# Altium PCB pcb.PcbDoc
Units mm, origin at the board's own origin, x right, y up, seen from the top; angles counter-clockwise.
Board outline 125 x 90 mm, 2 copper layers (Top Layer, Bottom Layer); 5 components, 8 nets, 56 pads, 0 vias.
Unrouted connection lines stored in the file: 8.
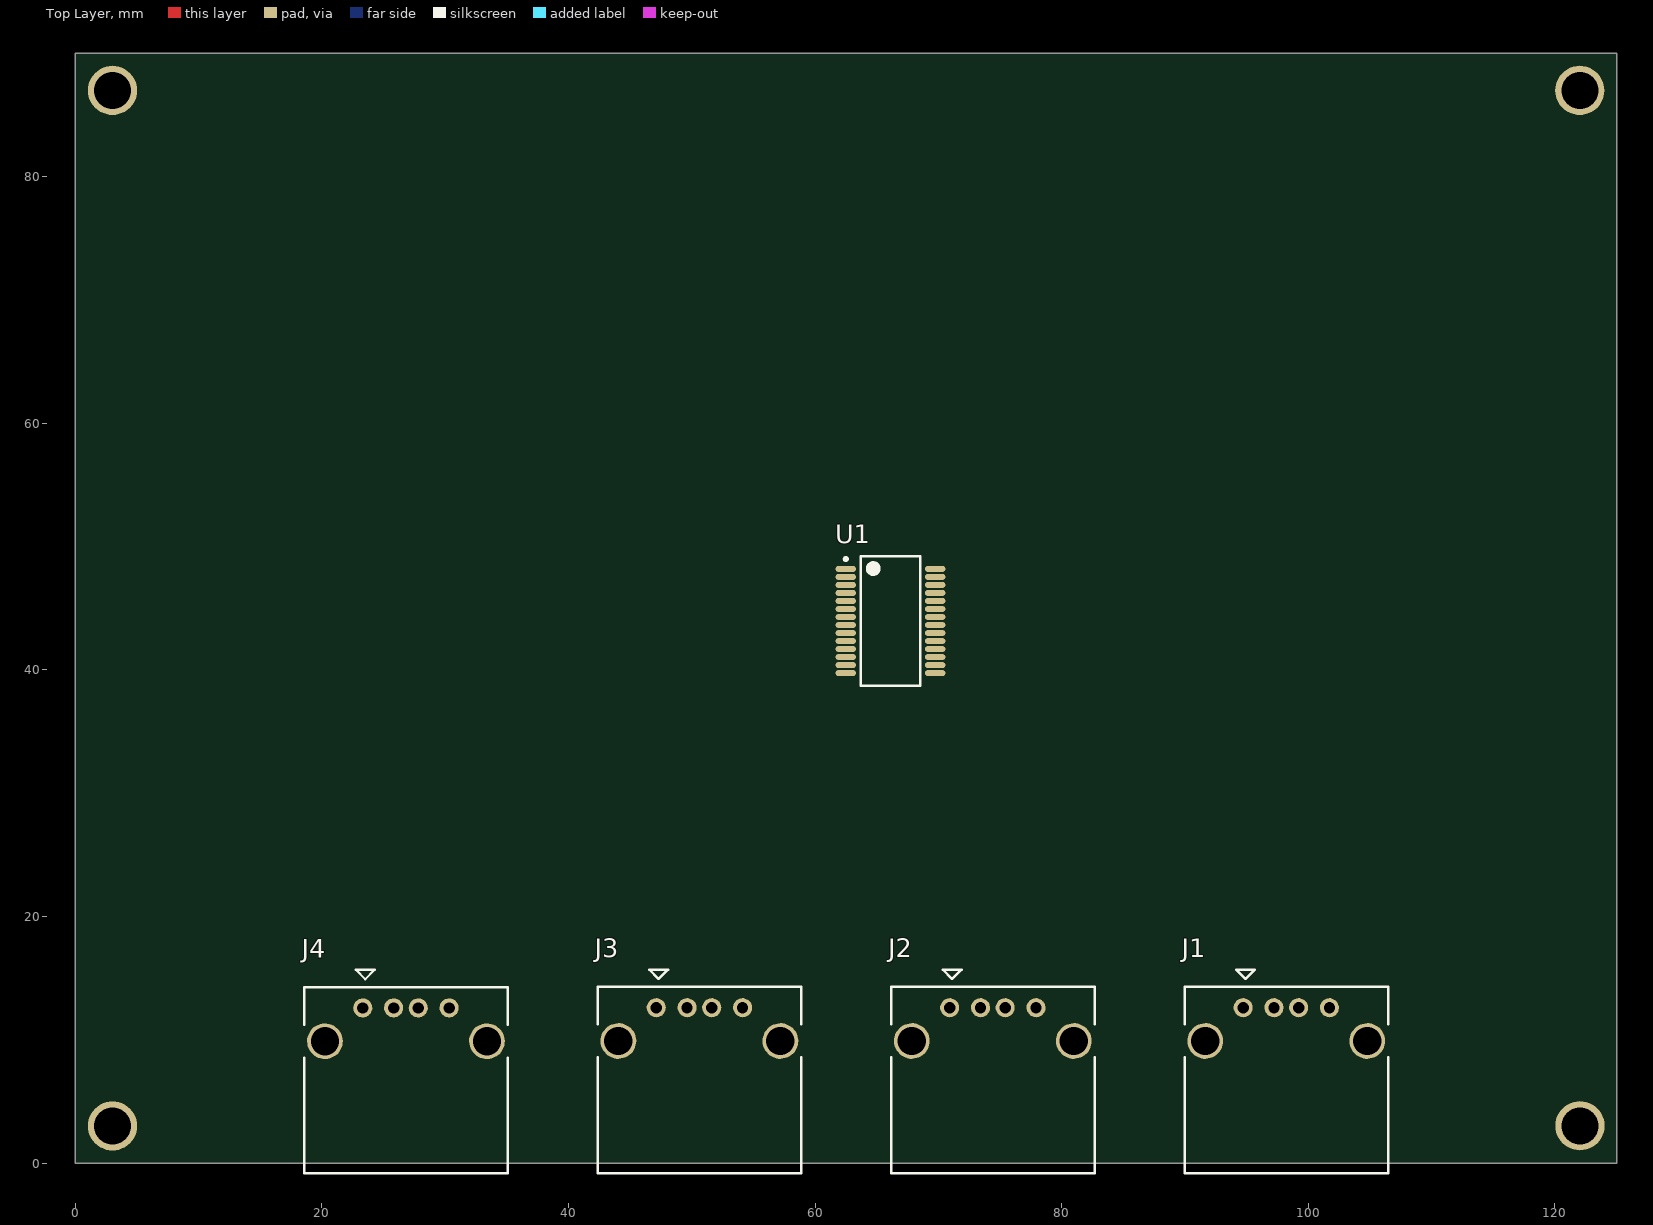
[diagram p0: Top Layer view]
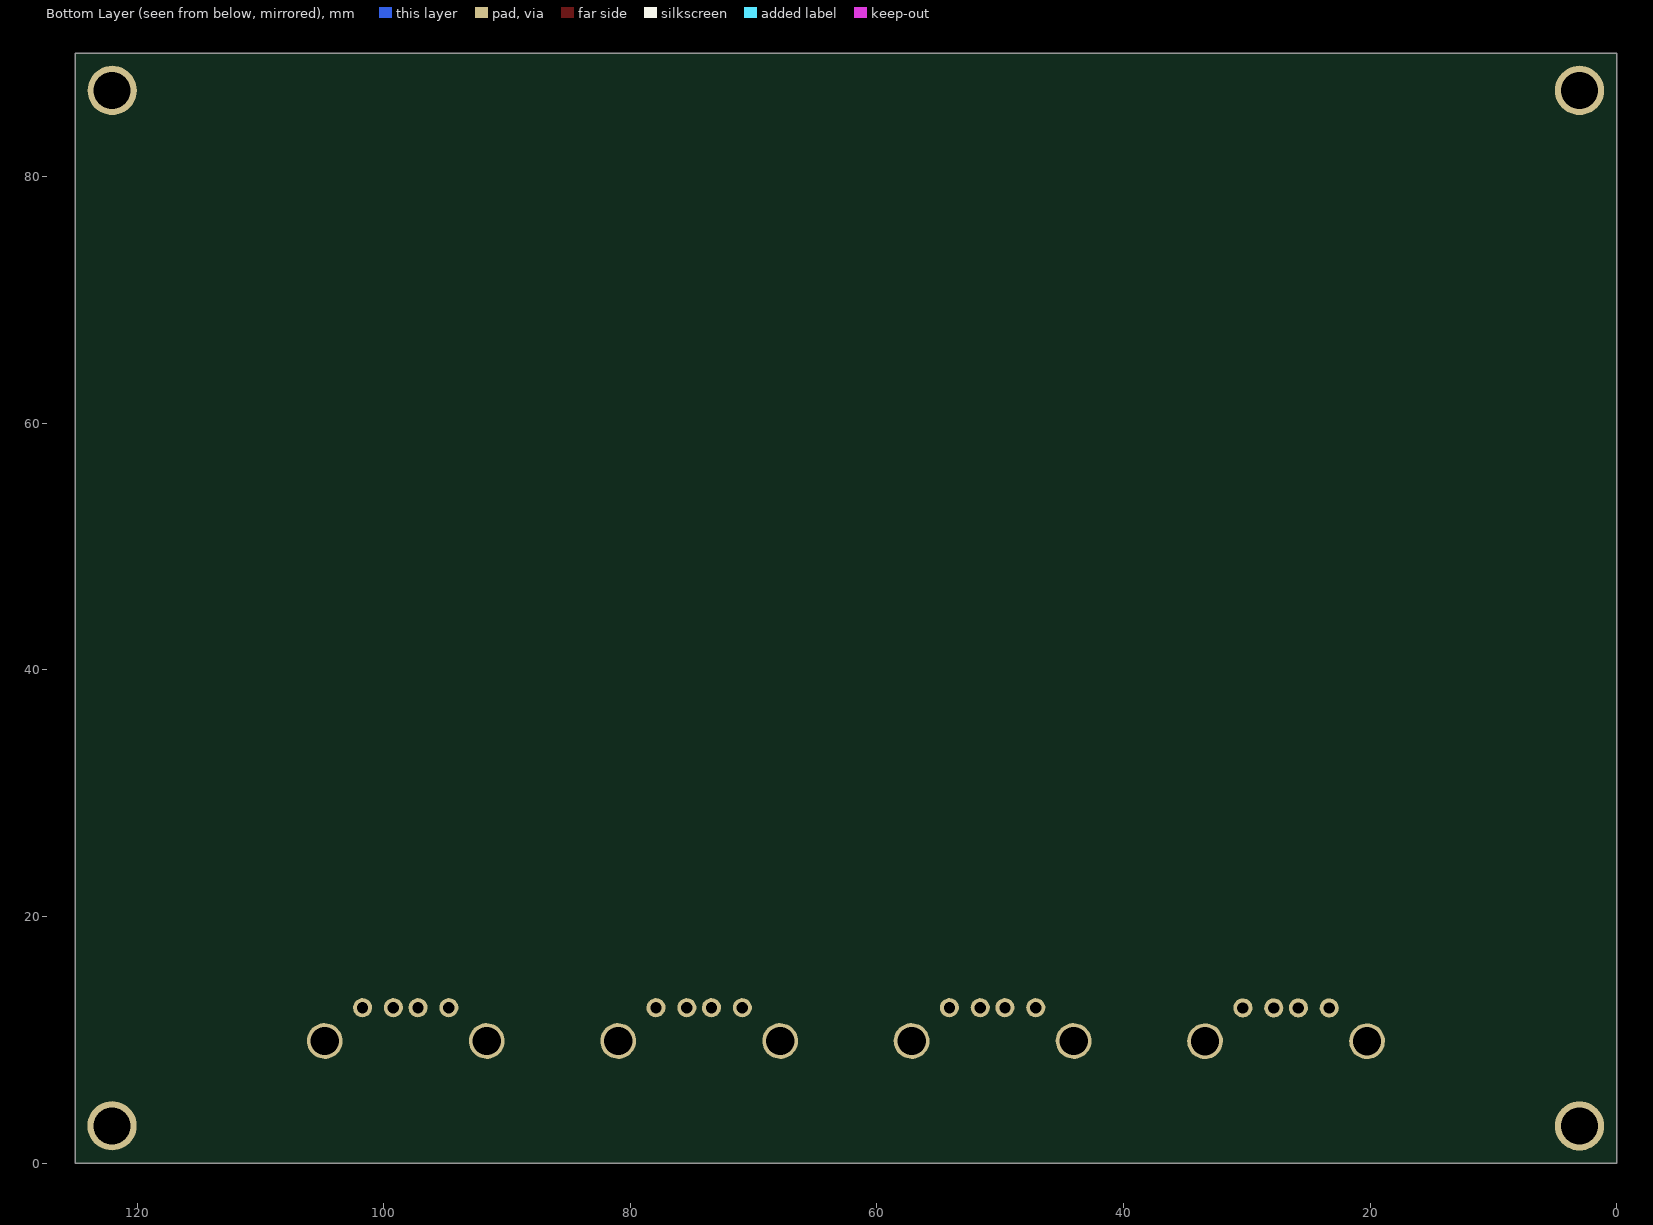
[diagram p1: Bottom Layer view, seen from below]

## Layer stack, top to bottom
Top Solder: solder mask 0.0102, Solder Resist, Dk 3.5
Top Layer: signal copper 0.0356
Dielectric 1: dielectric 0.32, FR-4, Dk 4.8
Bottom Layer: signal copper 0.0356
Bottom Solder: solder mask 0.0102, Solder Resist, Dk 3.5

## Board outline
0,0 125,0 125,90 0,90

## Design rules (kind name [scope] priority, off if disabled: settings)
Clearance [All] p1: gap=0.254
PolygonConnect [All] p1: connectstyle=Relief reliefconductorwidth=0.254 reliefentries=4 polygonreliefangle="90 Angle" airgapwidth=0.254
RoutingVias [All] p1: holewidth=0.711 width=1.27 viastyle="Through Hole" minholewidth=0.711 minwidth=1.27 maxholewidth=0.711 maxwidth=1.27
SolderMaskExpansion [All] p1: expansion=0.102
Width [All] p1: maxlimit=0.254 minlimit=0.254 preferedwidth=0.254
30 further rules are at their usual default settings.

## Components (designator, comment, footprint, x,y, rotation, side; value= is the part's Value field where it differs from the comment)
J1 "8492121" WE-EPLE 98.21,11.25 r0 top
J2 "8492121" WE-EPLE 74.41,11.25 r0 top
J3 "8492121" WE-EPLE 50.61,11.25 r0 top
J4 "8492121" WE-EPLE 26.81,11.23 r0 top
U1 "GL850G" SOP65P780X200-28N 66.108,43.966 r0 top

## Footprints (in the part's own frame and the unit in brackets; to place one, negate y for a bottom-side part, rotate by r counter-clockwise, add the part's x,y. Pads: shape width x height; smd on the part's side, far side on the other; paste and mask are expansions set on the pad)
SOP65P780X200-28N [mm] "SOP, 28-Leads, Body 10.20x5.30mm, Pitch 0.65mm, IPC Medium Density"
  oval 1.65x0.5 smd: 1(-3.625,4.225) 2(-3.625,3.575) 3(-3.625,2.925) 4(-3.625,2.275) 5(-3.625,1.625) 6(-3.625,0.975) 7(-3.625,0.325) 8(-3.625,-0.325) 9(-3.625,-0.975) 10(-3.625,-1.625) 11(-3.625,-2.275) 12(-3.625,-2.925) 13(-3.625,-3.575) 14(-3.625,-4.225) 15(3.625,-4.225) 16(3.625,-3.575) 17(3.625,-2.925) 18(3.625,-2.275) 19(3.625,-1.625) 20(3.625,-0.975) 21(3.625,-0.325) 22(3.625,0.325) 23(3.625,0.975) 24(3.625,1.625) 25(3.625,2.275) 26(3.625,2.925) 27(3.625,3.575) 28(3.625,4.225)
  silkscreen extent -3.75,-5.25 2.4,5.25, body extent -3.9,-5.25 3.9,5.25, height 2
WE-EPLE [mm] "THT, USB 2.0 A Connector, 4Pin, Body 15.8 x14.5mm"
  round 1.55 hole 0.92: 1(-3.5,1.35) 2(-1,1.35) 3(1,1.35) 4(3.5,1.35)
  round 2.9 hole 2.3: MH1(-6.57,-1.35) MH2(6.57,-1.35)
  silkscreen extent -8.25,-12.06 8.25,4.44, body extent -7.89,-11.7 7.87,2.8, height 7.8

## Part data
J1 J2 J3 J4: library part "WE-EPLE USB 2.0 A Connector, 8492121", "THT USB 2.0 A Connector WE-EPLE"

## Free pads (board coordinates)
  round 4 hole 3: 4(3.013,87) 5(3.013,3.013) 6(122.025,3.025) 7(122.012,87)

## Nets (pads, with @x,y where several pads share a name; then routed paths per layer and width w, separated by ;. In a path a pad name is that pad's centre, name@x,y a point inside that pad or via, vN(x,y) a via of type N, cw(c..) or ccw(c..) an arc to the next point about the centre after c; other vN are vias at no path point)
NetJ1_2: J1.2 U1.27
NetJ1_3: J1.3 U1.28
NetJ2_2: J2.2 U1.11
NetJ2_3: J2.3 U1.12
NetJ3_2: J3.2 U1.8
NetJ3_3: J3.3 U1.9
NetJ4_2: J4.2 U1.2
NetJ4_3: J4.3 U1.3
pads on no net: J1.1 J1.4 J1.MH1 J1.MH2 J2.1 J2.4 J2.MH1 J2.MH2 J3.1 J3.4 J3.MH1 J3.MH2 J4.1 J4.4 J4.MH1 J4.MH2 U1.1 U1.4 U1.5 U1.6 U1.7 U1.10 U1.13 U1.14 U1.15 U1.16 U1.17 U1.18 U1.19 U1.20 U1.21 U1.22 U1.23 U1.24 U1.25 U1.26

## Silkscreen, mask and mechanical layers (free items; w line width, h text height)
Mechanical 1:
  circle w0.013: c35.467,80.506 r1.25
  circle w0.013: c110.467,80.506 r1.25
  circle w0.013: c3.006,87.006 r1.6
  circle w0.013: c122.006,3.006 r1.6
  circle w0.013: c122.006,87.006 r1.6
  circle w0.013: c3.006,3.006 r1.6
  circle w0.013: c110.467,29.506 r1.25
  circle w0.013: c35.467,29.506 r1.25
  lines w0.013: 0.006,0.006 0.006,90.006 125.006,90.006 125.006,0.006 0.006,0.006

## Dimensions
3.013,3.013 to 122.025,3.025 on Mechanical 1
98.21,11.25 to 122.025,3.025 on Mechanical 1
74.41,11.25 to 98.21,11.25 on Mechanical 1
50.61,11.25 to 74.41,11.25 on Mechanical 1
26.81,11.23 to 50.61,11.25 on Mechanical 1
3.013,3.013 to 26.81,11.23 on Mechanical 1